# Altium PCB test-board-molex-bias-tee.PcbDoc (part 2 of 2)
Units mil, origin at the board's own origin, x right, y up, seen from the top; angles counter-clockwise.
Board outline 5500 x 3250 mil, 4 copper layers (Top Layer, Mid-Layer 1, Mid-Layer 2, Bottom Layer), stack 43.512 mil thick; 35 components, 16 nets, 287 pads, 1498 vias.
Unrouted connection lines stored in the file: 13.
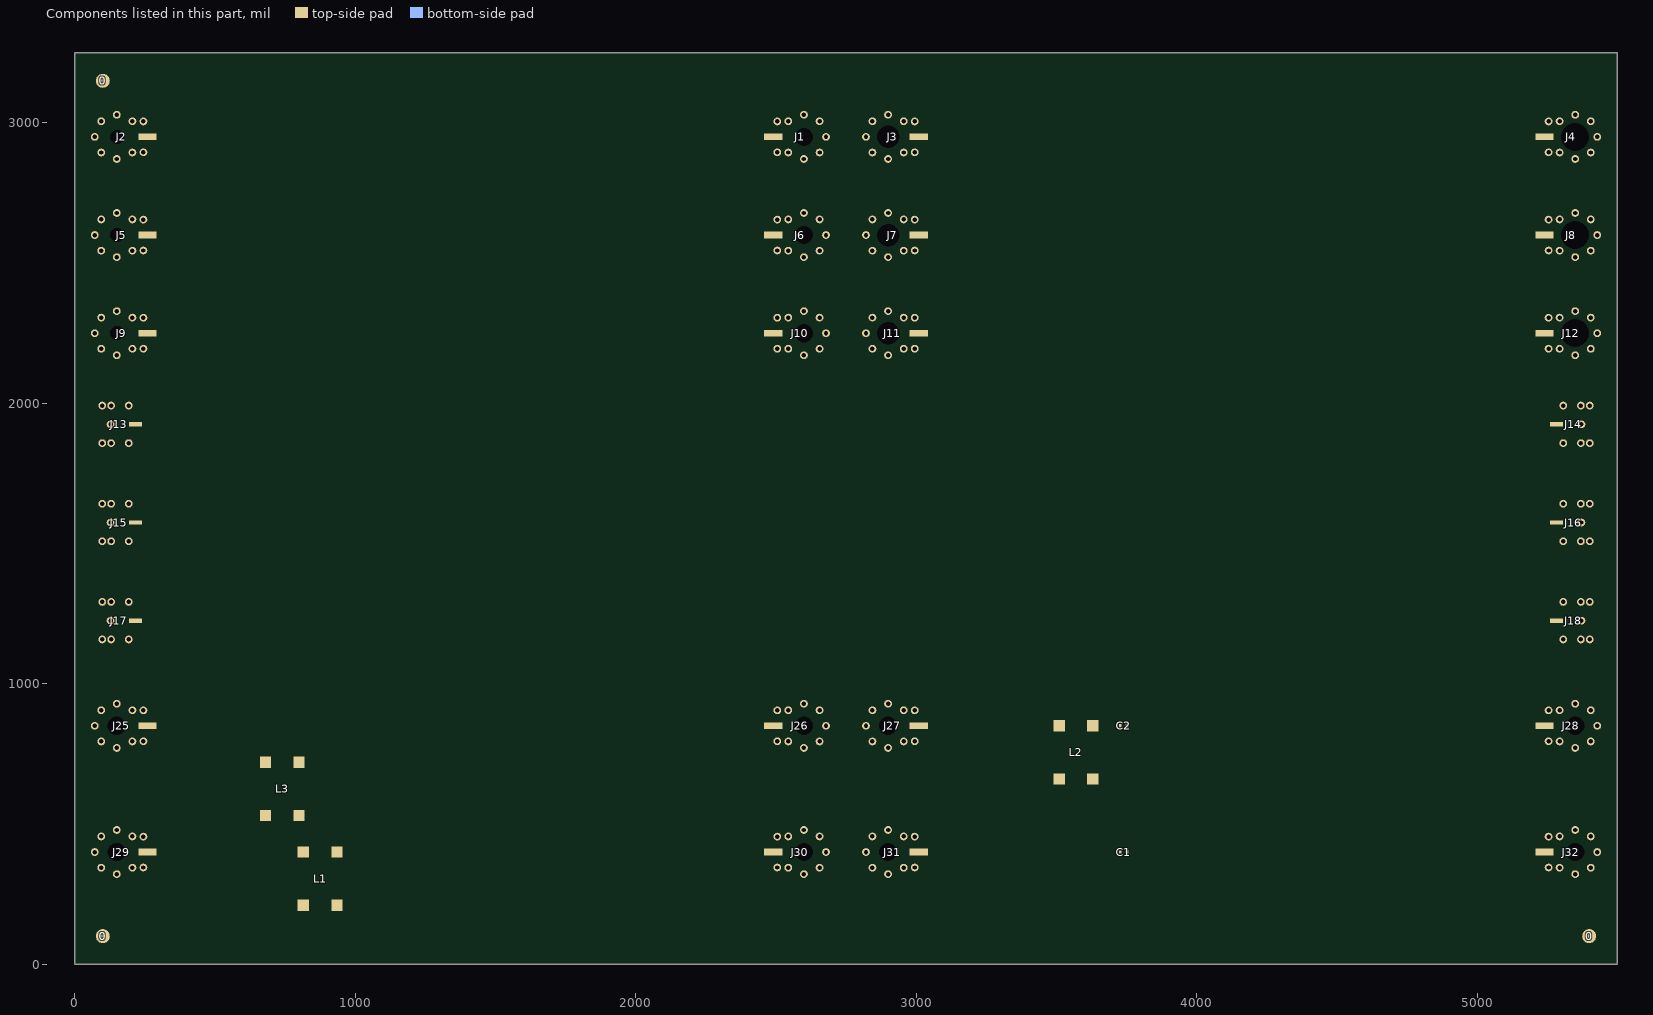
[diagram p4: the components of this part, seen from the top]

## Other copper (continued)
Bottom Layer:
  pour cut-out: 84.5,400.5 ccw(c150,400.5) 150,335 ccw(c150,400.5) 215.5,400.5 ccw(c150,400.5) 150,466 ccw(c150,400.5)
  pour cut-out: 84.5,850.5 ccw(c150,850.5) 150,785 ccw(c150,850.5) 215.5,850.5 ccw(c150,850.5) 150,916 ccw(c150,850.5)
  pour cut-out: 5284.5,400.5 ccw(c5350,400.5) 5350,335 ccw(c5350,400.5) 5415.5,400.5 ccw(c5350,400.5) 5350,466 ccw(c5350,400.5)
  pour cut-out: 5284.5,850.5 ccw(c5350,850.5) 5350,785 ccw(c5350,850.5) 5415.5,850.5 ccw(c5350,850.5) 5350,916 ccw(c5350,850.5)
  pour cut-out: 2834.5,850.5 ccw(c2900,850.5) 2900,785 ccw(c2900,850.5) 2965.5,850.5 ccw(c2900,850.5) 2900,916 ccw(c2900,850.5)
  pour cut-out: 2834.5,400.5 ccw(c2900,400.5) 2900,335 ccw(c2900,400.5) 2965.5,400.5 ccw(c2900,400.5) 2900,466 ccw(c2900,400.5)
  pour cut-out: 2534.5,400.5 ccw(c2600,400.5) 2600,335 ccw(c2600,400.5) 2665.5,400.5 ccw(c2600,400.5) 2600,466 ccw(c2600,400.5)
  pour cut-out: 2534.5,850.5 ccw(c2600,850.5) 2600,785 ccw(c2600,850.5) 2665.5,850.5 ccw(c2600,850.5) 2600,916 ccw(c2600,850.5)
  pour cut-out: 84.5,400.5 ccw(c150,400.5) 150,335 ccw(c150,400.5) 215.5,400.5 ccw(c150,400.5) 150,466 ccw(c150,400.5)
  pour cut-out: 84.5,850.5 ccw(c150,850.5) 150,785 ccw(c150,850.5) 215.5,850.5 ccw(c150,850.5) 150,916 ccw(c150,850.5)
  pour cut-out: 5284.5,2600.5 ccw(c5350,2600.5) 5350,2535 ccw(c5350,2600.5) 5415.5,2600.5 ccw(c5350,2600.5) 5350,2666 ccw(c5350,2600.5)
  pour cut-out: 5284.5,2250.5 ccw(c5350,2250.5) 5350,2185 ccw(c5350,2250.5) 5415.5,2250.5 ccw(c5350,2250.5) 5350,2316 ccw(c5350,2250.5)
  pour cut-out: 2834.5,2250.5 ccw(c2900,2250.5) 2900,2185 ccw(c2900,2250.5) 2965.5,2250.5 ccw(c2900,2250.5) 2900,2316 ccw(c2900,2250.5)
  pour cut-out: 2834.5,2600.5 ccw(c2900,2600.5) 2900,2535 ccw(c2900,2600.5) 2965.5,2600.5 ccw(c2900,2600.5) 2900,2666 ccw(c2900,2600.5)
  pour cut-out: 2534.5,2600.5 ccw(c2600,2600.5) 2600,2535 ccw(c2600,2600.5) 2665.5,2600.5 ccw(c2600,2600.5) 2600,2666 ccw(c2600,2600.5)
  pour cut-out: 2534.5,2250.5 ccw(c2600,2250.5) 2600,2185 ccw(c2600,2250.5) 2665.5,2250.5 ccw(c2600,2250.5) 2600,2316 ccw(c2600,2250.5)
  pour cut-out: 84.5,2250.5 ccw(c150,2250.5) 150,2185 ccw(c150,2250.5) 215.5,2250.5 ccw(c150,2250.5) 150,2316 ccw(c150,2250.5)
  pour cut-out: 84.5,2600.5 ccw(c150,2600.5) 150,2535 ccw(c150,2600.5) 215.5,2600.5 ccw(c150,2600.5) 150,2666 ccw(c150,2600.5)
  pour cut-out: 5284.5,2950.5 ccw(c5350,2950.5) 5350,2885 ccw(c5350,2950.5) 5415.5,2950.5 ccw(c5350,2950.5) 5350,3016 ccw(c5350,2950.5)
  pour cut-out: 2834.5,2950.5 ccw(c2900,2950.5) 2900,2885 ccw(c2900,2950.5) 2965.5,2950.5 ccw(c2900,2950.5) 2900,3016 ccw(c2900,2950.5)
  pour cut-out: 2534.5,2950.5 ccw(c2600,2950.5) 2600,2885 ccw(c2600,2950.5) 2665.5,2950.5 ccw(c2600,2950.5) 2600,3016 ccw(c2600,2950.5)
  pour cut-out: 84.5,2950.5 ccw(c150,2950.5) 150,2885 ccw(c150,2950.5) 215.5,2950.5 ccw(c150,2950.5) 150,3016 ccw(c150,2950.5)

## Silkscreen, mask and mechanical layers (free items; w line width, h text height)
Top Overlay:
  text "Molex 85305-0232" at 328,3163 h25
  text "Hole: 100 mil" at 5077.13,3068.13 h25
  text "Hole: 50 mil" at 167,3067 h25
  text "Hole: 65 mil" at 2325,3066 h25
  text "Hole: 80 mil" at 2790,3066 h25
  text "Gap:16 mil" at 220,2808.33 h25
  text "Gap:16 mil" at 2915,2808.33 h25
  text "Gap:16 mil" at 5135,2808.33 h25
  text "Gap:16 mil" at 2400,2803.33 h25
  text "Hole: 80 mil" at 2790,2717 h25
  text "Hole: 65 mil" at 2326,2716 h25
  text "Hole: 100 mil" at 5075,2715 h25
  text "Hole: 50 mil" at 50,2714 h25
  text "Gap:22 mil" at 215,2458.33 h25
  text "Gap:22 mil" at 2415,2458.33 h25
  text "Gap:22 mil" at 2886.26,2458.33 h25
  text "Gap:22 mil" at 5140,2458.33 h25
  text "Hole: 50 mil" at 49,2365 h25
  text "Hole: 65 mil" at 2325,2365 h25
  text "Hole: 80 mil" at 2790,2365 h25
  text "Hole: 100 mil" at 5075,2365 h25
  text "Gap:28 mil" at 215,2103.33 h25
  text "Gap:28 mil" at 2390,2103.33 h25
  text "Gap:28 mil" at 2815,2103.33 h25
  text "Gap:28 mil" at 5140,2103.33 h25
  text "Gap:32 mil" at 78,1784.33 h25
  text "Rosenberger 19S201-40ML5" at 326,1782.33 h25
  text "Gap:27 mil" at 5168,1779.33 h25
  text "Gap:22 mil" at 78,1434.33 h25
  text "Gap:17 mil" at 5168,1429.33 h25
  text "Gap:12 mil" at 78,1084.33 h25
  text "Gap:7 mil" at 5168,1079.33 h25
  text "Hole: 65 mil" at 2440,975 h25
  text "Hole: 65 mil" at 55,970 h25
  text "Hole: 65 mil" at 2795,970 h25
  text "Hole: 65 mil" at 5175,970 h25
  text "Coilcraft BCR-232 conical inductor" at 840,711 h25
  text "Gap:16 mil" at 55,708.33 h25
  text "Gap:16 mil" at 2505,708.33 h25
  text "Gap:16 mil" at 2805,708.33 h25
  text "Gap:16 mil" at 5175,708.33 h25
  text "Coilcraft BCR-232 conical inductor" at 3664,651 h25
  text "Hole: 65 mil" at 55,520 h25
  text "Hole: 65 mil" at 2440,520 h25
  text "Hole: 65 mil" at 2805,520 h25
  text "Hole: 65 mil" at 5189.5,520 h25
  text "Gap:16 mil" at 55,258.33 h25
  text "Gap:16 mil" at 2805,258.33 h25
  text "Gap:16 mil" at 5189.5,258.33 h25
  text "Gap:16 mil" at 2490,253.33 h25
  text "Capacitor: Passive Plus 0201BB104KW160 0201 0.1 uF 16 V" at 3190,244 h27
  text "Coilcraft BCR-232 conical inductor" at 964,199 h25
  text "rev 0" at 1670,120 h27
  text "All circular metal cutouts: 125 mil" at 235,85 h25
  text "Lafe Spietz" at 1670,71 h27
  text "test-board-molex-bias-tee" at 3080,55 h27
  text "All CPW 19.5 mil center, 6 mil gap" at 235,43.33 h25
  text "October 2024" at 1670,25 h27
Top Solder:
  rectangle: 250,1824.79 5245,2024.79
  rectangle: 250,1474.79 5245,1674.79
  rectangle: 180,1824.79 250,1905
  rectangle: 180,1945 250,2025.21
  region: 5315,2025.21 5230.98,2025.21 5230.98,1945 5315,1945
  region: 5315,1905 5230.98,1905 5230.98,1824.79 5315,1824.79
  rectangle: 180,1474.79 250,1555
  rectangle: 180,1595 250,1675.21
  region: 5315,1675.21 5230.98,1675.21 5230.98,1595 5315,1595
  region: 5315,1555 5230.98,1555 5230.98,1474.79 5315,1474.79
  region: 5315,1205 5230.98,1205 5230.98,1124.79 5315,1124.79
  region: 5315,1325.21 5230.98,1325.21 5230.98,1245 5315,1245
  rectangle: 180,1245 250,1325.21
  rectangle: 180,1124.79 250,1205
  rectangle: 249,1124.79 5245,1324.79
  rectangle: 3204,628 3469,688
  rectangle: 333.5,635 632,687
  rectangle: 332,185 614,235
  rectangle: 3060,2850 5190,3050
  rectangle: 3002.36,2978.54 3080,3050
  rectangle: 3002.36,2850 3080,2921.46
  rectangle: 5170,2850 5247.64,2921.46
  rectangle: 5150,2978.54 5247.64,3050
  rectangle: 3060,2500 5190,2700
  rectangle: 3002.36,2628.54 3080,2700
  rectangle: 3002.36,2500 3080,2571.46
  rectangle: 5170,2500 5247.64,2571.46
  rectangle: 5150,2628.54 5247.64,2700
  rectangle: 3060,2150 5190,2350
  rectangle: 3002.36,2278.54 3080,2350
  rectangle: 3002.36,2150 3080,2221.46
  rectangle: 5170,2150 5247.64,2221.46
  rectangle: 5150,2278.54 5247.64,2350
  rectangle: 4140,750 5190,950
  rectangle: 3002.36,878.54 3080,950
  rectangle: 3002.36,750 3080,821.46
  rectangle: 5170,750 5247.64,821.46
  rectangle: 5150,878.54 5247.64,950
  rectangle: 3785,300 5190,500
  rectangle: 3002.36,428.54 3080,500
  rectangle: 3002.36,300 3080,371.46
  rectangle: 5170,300 5247.64,371.46
  rectangle: 5150,428.54 5247.64,500
  rectangle: 1025,300 2440,500
  rectangle: 252.36,428.54 330,500
  rectangle: 252.36,300 330,371.46
  rectangle: 2420,300 2497.64,371.46
  rectangle: 2400,428.54 2497.64,500
  rectangle: 310,750 2440,950
  rectangle: 252.36,878.54 330,950
  rectangle: 252.36,750 330,821.46
  rectangle: 2420,750 2497.64,821.46
  rectangle: 2400,878.54 2497.64,950
  rectangle: 310,2150 2440,2350
  rectangle: 252.36,2278.54 330,2350
  rectangle: 252.36,2150 330,2221.46
  rectangle: 2420,2150 2497.64,2221.46
  rectangle: 2400,2278.54 2497.64,2350
  rectangle: 310,2500 2440,2700
  rectangle: 252.36,2628.54 330,2700
  rectangle: 252.36,2500 330,2571.46
  rectangle: 2420,2500 2497.64,2571.46
  rectangle: 2400,2628.54 2497.64,2700
  rectangle: 2400,2978.54 2497.64,3050
  rectangle: 2420,2850 2497.64,2921.46
  rectangle: 252.36,2850 330,2921.46
  rectangle: 252.36,2978.54 330,3050
  rectangle: 315,2850 2440,3050
  pour cut-out: 3710,830 3710,870 3770,870 3770,830
  pour cut-out: 3710,380 3710,420 3770,420 3770,380
  pour cut-out: 900,368 900,432 970,432 970,368
  pour cut-out: 779,368 779,432 849,432 849,368
  pour cut-out: 3595,817 3595,881 3665,881 3665,817
  pour cut-out: 3475,818 3475,882 3545,882 3545,818
Mechanical 3:
  lines w1: 300,2125 300,2944 ; 2470,2922 2470,2938 ; 5306,1217 5312,1217 5312,1211 ; 5306,1233 5312,1233 5312,1239 ; 5306,1567 5323,1567 5323,1550 ; 5306,1583 5323,1583 5323,1600